# EAGLE board Esp32-driver_Danu Kartiko K (EAGLE 9.6.1)
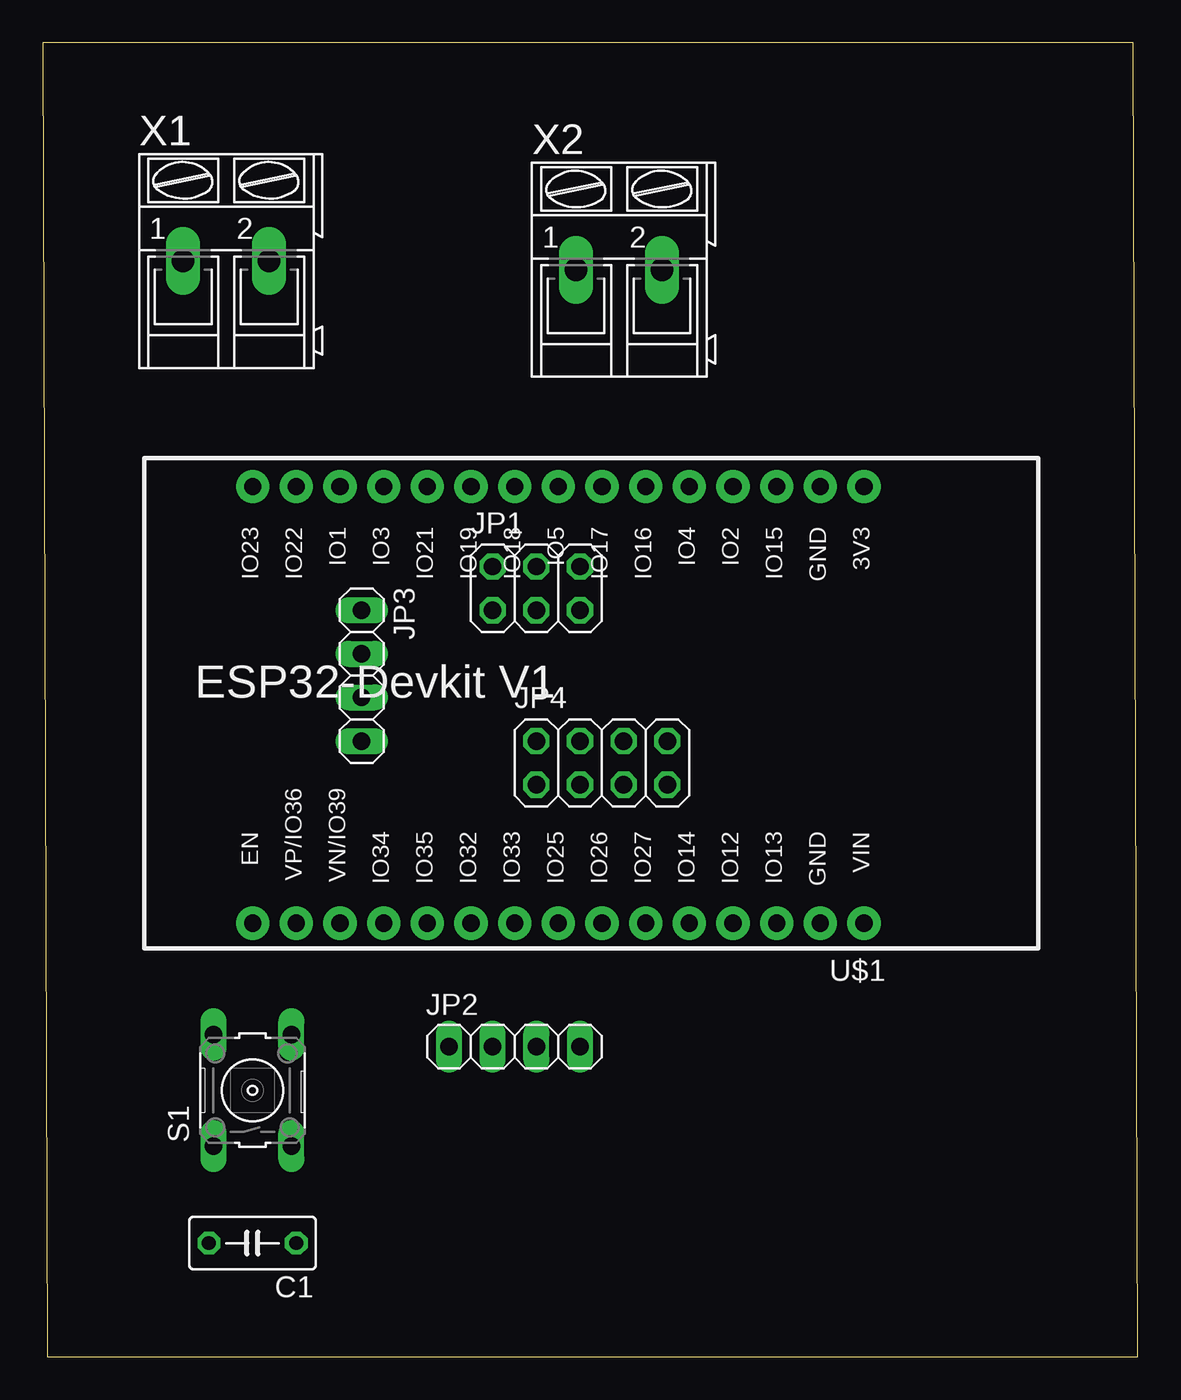
[diagram p0: board, top side]
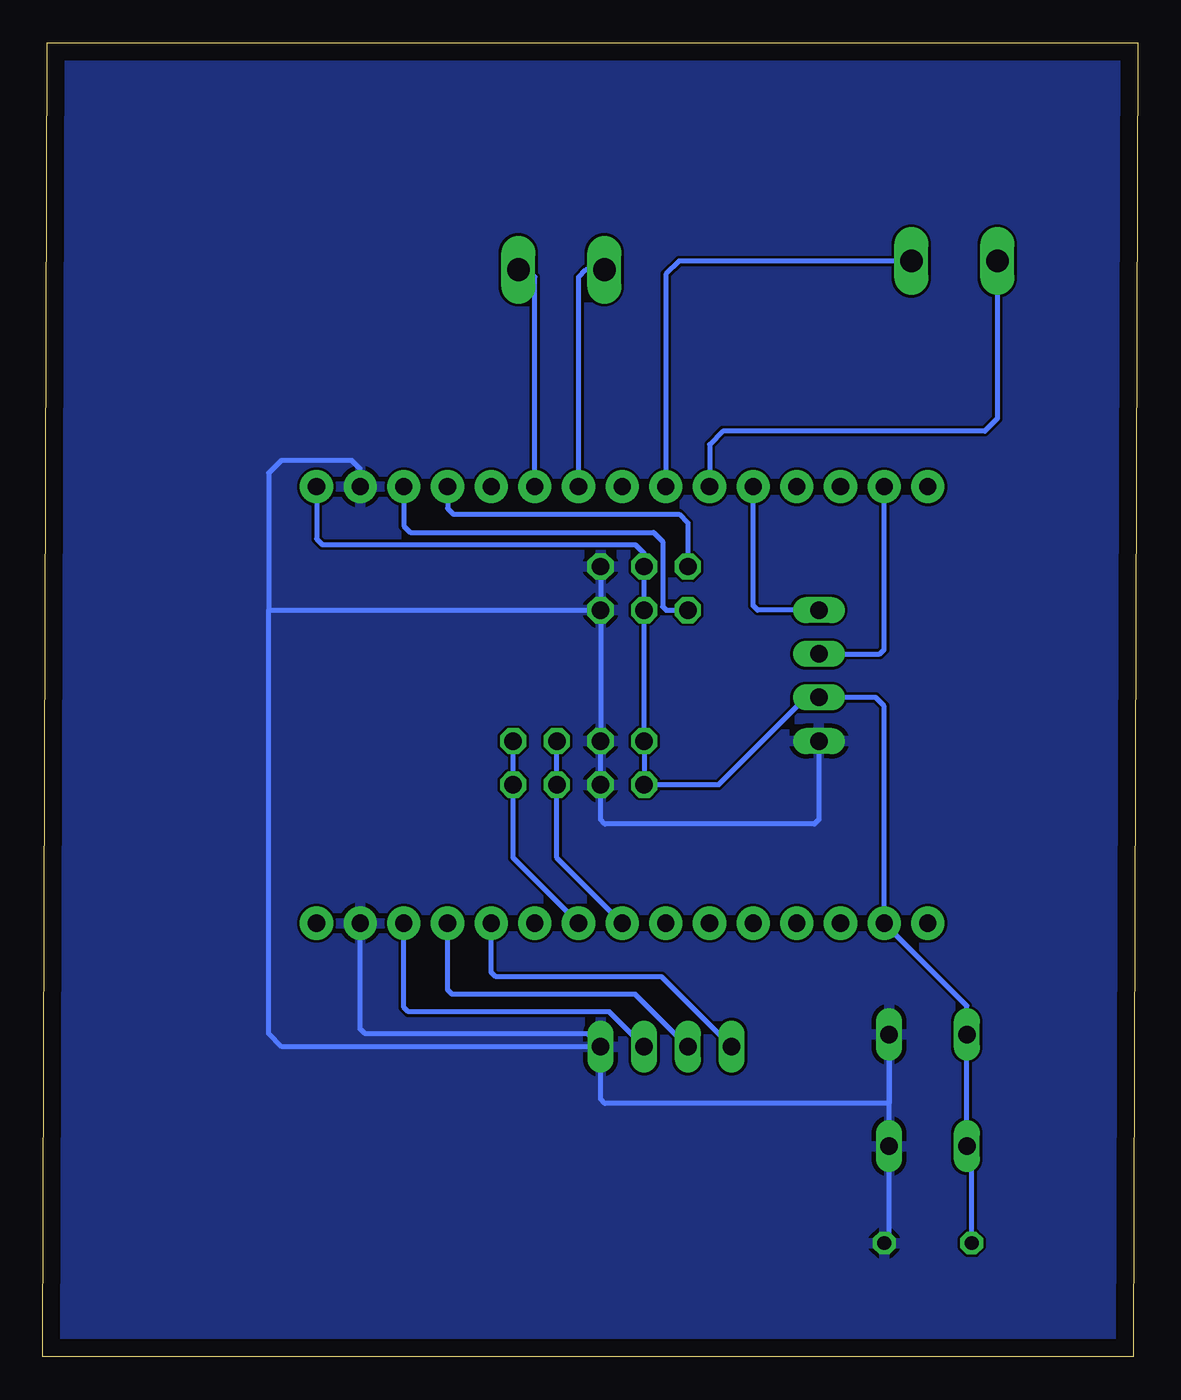
[diagram p1: board, bottom side, seen from below]

Size 63.68 x 76.44 mm. Coordinates in mm from the lower left corner, seen from the top.
Outline: 0.25,0 63.68,0 63.42,76.44 0,76.44 0.25,0
Copper layers (1*16): Top 0.035mm / dielectric 1.5mm / Bottom 0.035mm
Design rules "default": minimum track width 6mil, minimum drill 0.35mm, track to track 6mil, track to pad 6mil, pad to pad 6mil, via to via 6mil, smd to smd 6mil, copper to edge 40mil, drill to drill 6mil, minimum pad ring 10mil, minimum via ring 8mil, stop-mask expansion 4mil, vias tented up to drill 0mil, thermal gap 10mil

## Footprints (pad centres in the part's own frame; a part is rotated, then mirrored left to right if it is on the bottom)
C050-030X075 = drill 0.813 octagon: 1 -2.54,0; 2 2.54,0
2X03 = drill 1.016 octagon: 1 -2.54,-1.27; 2 -2.54,1.27; 3 0,-1.27; 4 0,1.27; 5 2.54,-1.27; 6 2.54,1.27
1X04 = drill 1.016 long: 1 -3.81,0; 2 -1.27,0; 3 1.27,0; 4 3.81,0
2X04 = drill 1.016 octagon: 1 -3.81,-1.27; 2 -3.81,1.27; 3 -1.27,-1.27; 4 -1.27,1.27; 5 1.27,-1.27; 6 1.27,1.27; 7 3.81,-1.27; 8 3.81,1.27
B3F-10XX = drill 1.016 long: 1 -3.251,2.261; 2 3.251,2.261; 3 -3.251,-2.261; 4 3.251,-2.261
ESP32-DEVKITV1 = drill 1 pad 1.93: 3V3 -16.52,-12.27; D1 13.96,-12.27; D2 -8.9,-12.27; D3 11.42,-12.27; D4 -6.36,-12.27; D5 1.26,-12.27; D12 -8.9,13.135; D13 -11.44,13.135; D14 -6.36,13.135; D15 -11.44,-12.27; D16 -3.82,-12.27; D17 -1.28,-12.27; D18 3.8,-12.27; D19 6.34,-12.27; D21 8.88,-12.27; D22 16.5,-12.27; D23 19.04,-12.27; D25 1.26,13.135; D26 -1.28,13.135; D27 -3.82,13.135; D32 6.34,13.135; D33 3.8,13.135; D34 11.42,13.135; D35 8.88,13.135; D36 16.5,13.135; D39 13.96,13.135; EN 19.04,13.135; GND@1 -13.98,13.135; GND@2 -13.98,-12.27; VIN -16.52,13.135
AK300/2 = drill 1.321 long: 1 -2.515,0; 2 2.489,0

## Placement (x,y rotation side)
C1  [C050-030X075]  12.19,6.6 180 top
JP1  [2X03]  28.7,44.7 0 top
JP2  [1X04]  27.43,18.03 0 top
JP3  [1X04]  18.54,39.62 270 top
JP4  [2X04]  32.51,34.54 0 top
S1  [B3F-10XX]  12.19,15.49 90 top
U$1  ESP32DEVKITV1  [ESP32-DEVKITV1]  31.24,38.35 180 top
X1  [AK300/2]  10.67,63.75 0 top
X2  [AK300/2]  33.53,63.25 0 top

## Library data of the parts
C1 = rcl; SPICEPREFIX: C
JP1-JP4 = pinhead
S1 = switch-omron; MPN: B3F-1000; OC_FARNELL: 176432; OC_NEWARK: 36M3542
U$1 = esp32-devkitv1
X1 X2 = con-ptr500; OC_FARNELL: unknown; OC_NEWARK: unknown

## Nets
GND: C1.1 JP1.5 JP1.6 JP2.4 JP3.4 JP4.3 JP4.4 S1.3 S1.4 U$1.GND@1 U$1.GND@2
MOISTURE: JP1.2 U$1.D2
N$1: U$1.D19 X1.1
N$2: U$1.D18 X1.2
N$3: U$1.D17 X2.1
N$4: U$1.D16 X2.2
OUT1: JP2.1 U$1.D14
OUT2: JP2.2 U$1.D12
OUT3: JP2.3 U$1.D13
PH: JP1.1 U$1.D15
SCL: JP3.2 U$1.D22
SCL2: JP4.5 JP4.6 U$1.D25
SDA: JP3.1 U$1.D21
SDA2: JP4.7 JP4.8 U$1.D26
V: C1.2 JP1.3 JP1.4 JP3.3 JP4.1 JP4.2 S1.1 S1.2 U$1.3V3 U$1.D36
VIN: U$1.VIN

## Tracks (layer width: path | path; a pad name or v marks a point on that pad's centre or on a via)
GND
  Bottom 0.305: JP2.4 31.24,14.99 30.99,14.73 14.45,14.73 S1.4 S1.3 14.45,6.88 C1.1 | JP2.4 32,18.8 44.96,18.8 45.22,19.06 U$1.GND@1 | JP3.4 18.54,31.24 18.8,30.99 30.99,30.99 31.24,31.24 JP4.3 JP4.4 JP1.5 | JP1.6 JP1.5 | 50.55,43.43 JP1.5 | JP2.4 49.78,18.03 50.55,18.8 50.55,43.43 | 50.55,43.43 50.55,51.41 49.81,52.15 45.71,52.15 45.22,51.66 U$1.GND@2
  pour Bottom: 0,76.45 63.63,76.45 63.63,0 0,0
MOISTURE
  Bottom 0.305: 40.14,49.79 U$1.D2 40.14,49.35 39.81,49.02 26.67,49.02 26.16,48.51 JP1.2
N$1
  Bottom 0.305: X1.1 8.15,54.59 8.89,53.85 24.13,53.85 24.9,53.08 U$1.D19
N$2
  Bottom 0.305: X1.2 26.67,63.75 27.44,62.98 U$1.D18
N$3
  Bottom 0.305: U$1.D17 32.52,62.82 32.09,63.25 X2.1
N$4
  Bottom 0.305: U$1.D16 35.06,62.82 35.49,63.25 X2.2
OUT1
  Bottom 0.305: JP2.1 27.69,22.1 37.34,22.1 37.6,22.36 U$1.D14
OUT2
  Bottom 0.305: JP2.2 29.21,21.08 39.88,21.08 40.14,21.35 U$1.D12
OUT3
  Bottom 0.305: JP2.3 30.73,20.07 42.42,20.07 42.68,20.33 U$1.D13
PH
  Bottom 0.305: JP1.1 27.43,43.43 27.63,43.64 27.63,47.43 28.16,47.96 42.3,47.96 42.68,48.34 U$1.D15
SCL
  Bottom 0.305: JP3.2 14.99,40.89 14.74,41.14 U$1.D22
SCL2
  Bottom 0.305: JP4.6 JP4.5 33.78,29.02 U$1.D25
SDA
  Bottom 0.305: JP3.1 22.1,43.43 22.36,43.7 U$1.D21
SDA2
  Bottom 0.305: JP4.8 JP4.7 36.32,29.02 U$1.D26
V
  Bottom 0.305: C1.2 9.65,11.96 S1.1 S1.2 9.93,20.41 U$1.D36 14.74,37.86 15.24,38.35 JP3.3 19.3,38.35 24.38,33.27 JP4.1 JP4.2 JP1.3 JP1.4 28.7,46.74 29.21,47.24 47.43,47.24 47.76,47.58 U$1.3V3